# Altium PCB AnalyzerEMG.PcbDoc
Units mm, origin at the board's own origin, x right, y up, seen from the top; angles counter-clockwise.
Board outline 57.78 x 36.83 mm, 2 copper layers (Top Layer, Bottom Layer); 29 components, 22 nets, 79 pads, 11 vias.
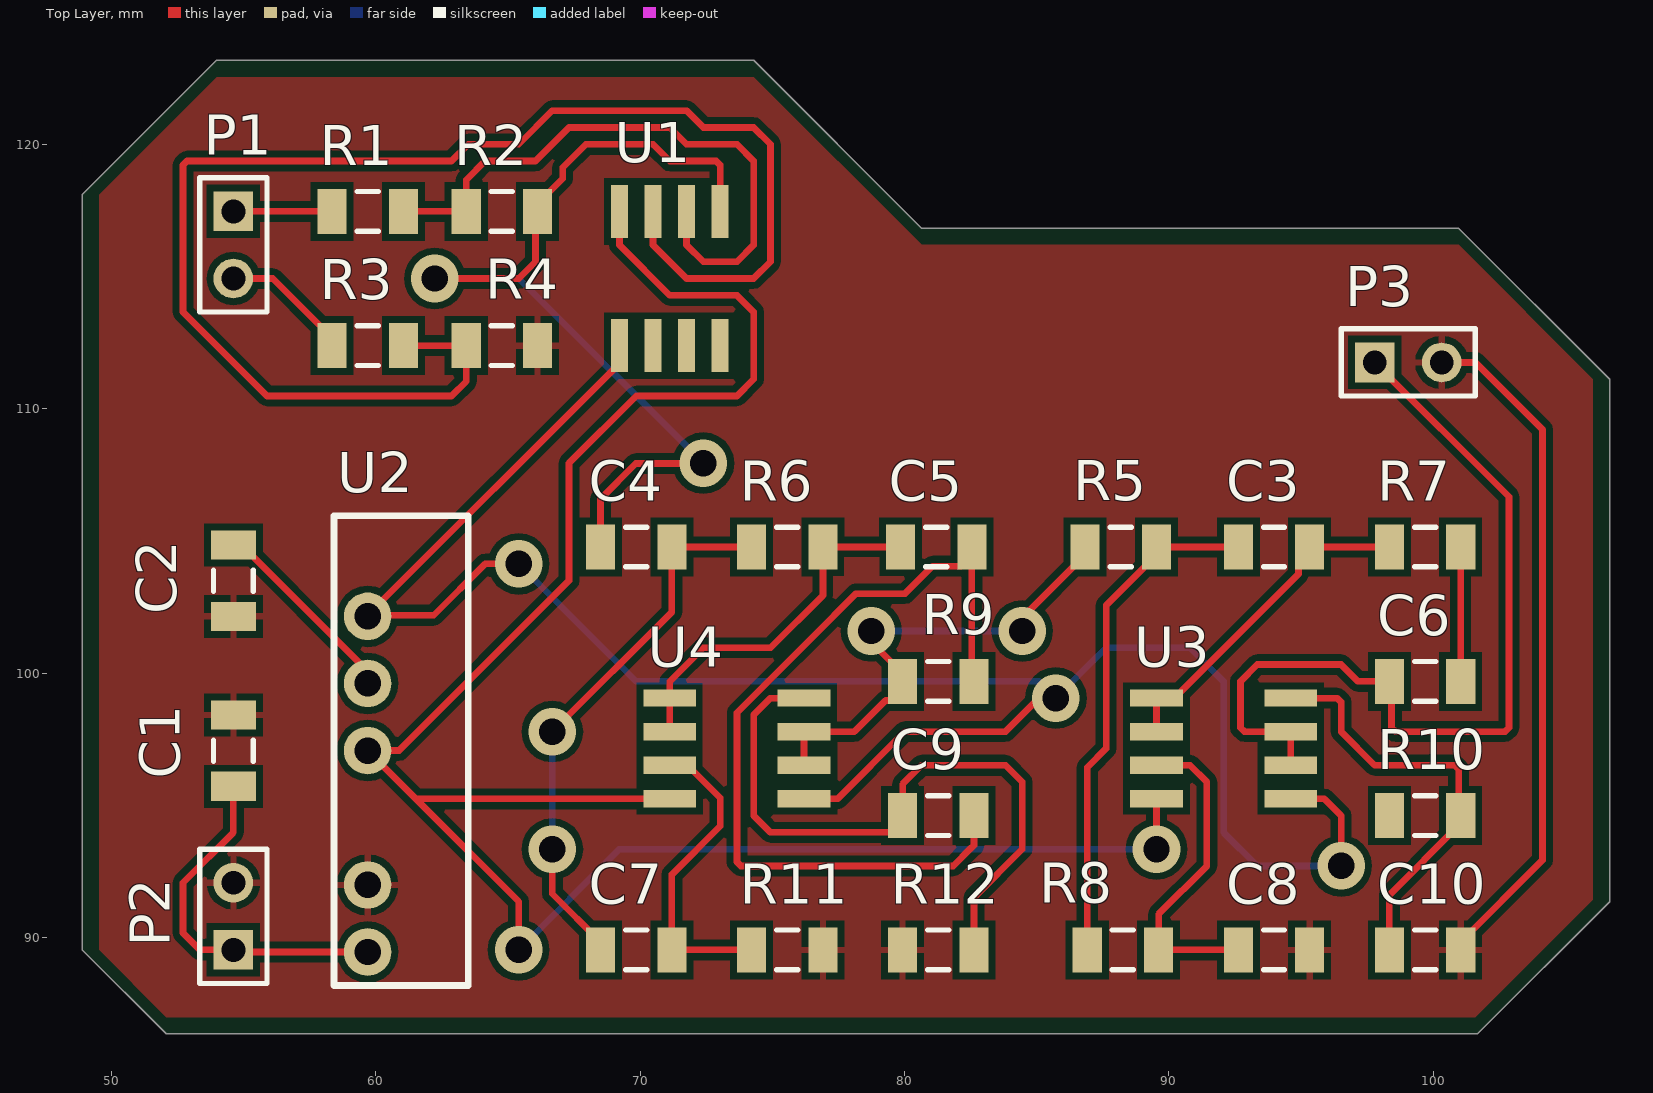
[diagram p0: Top Layer view]
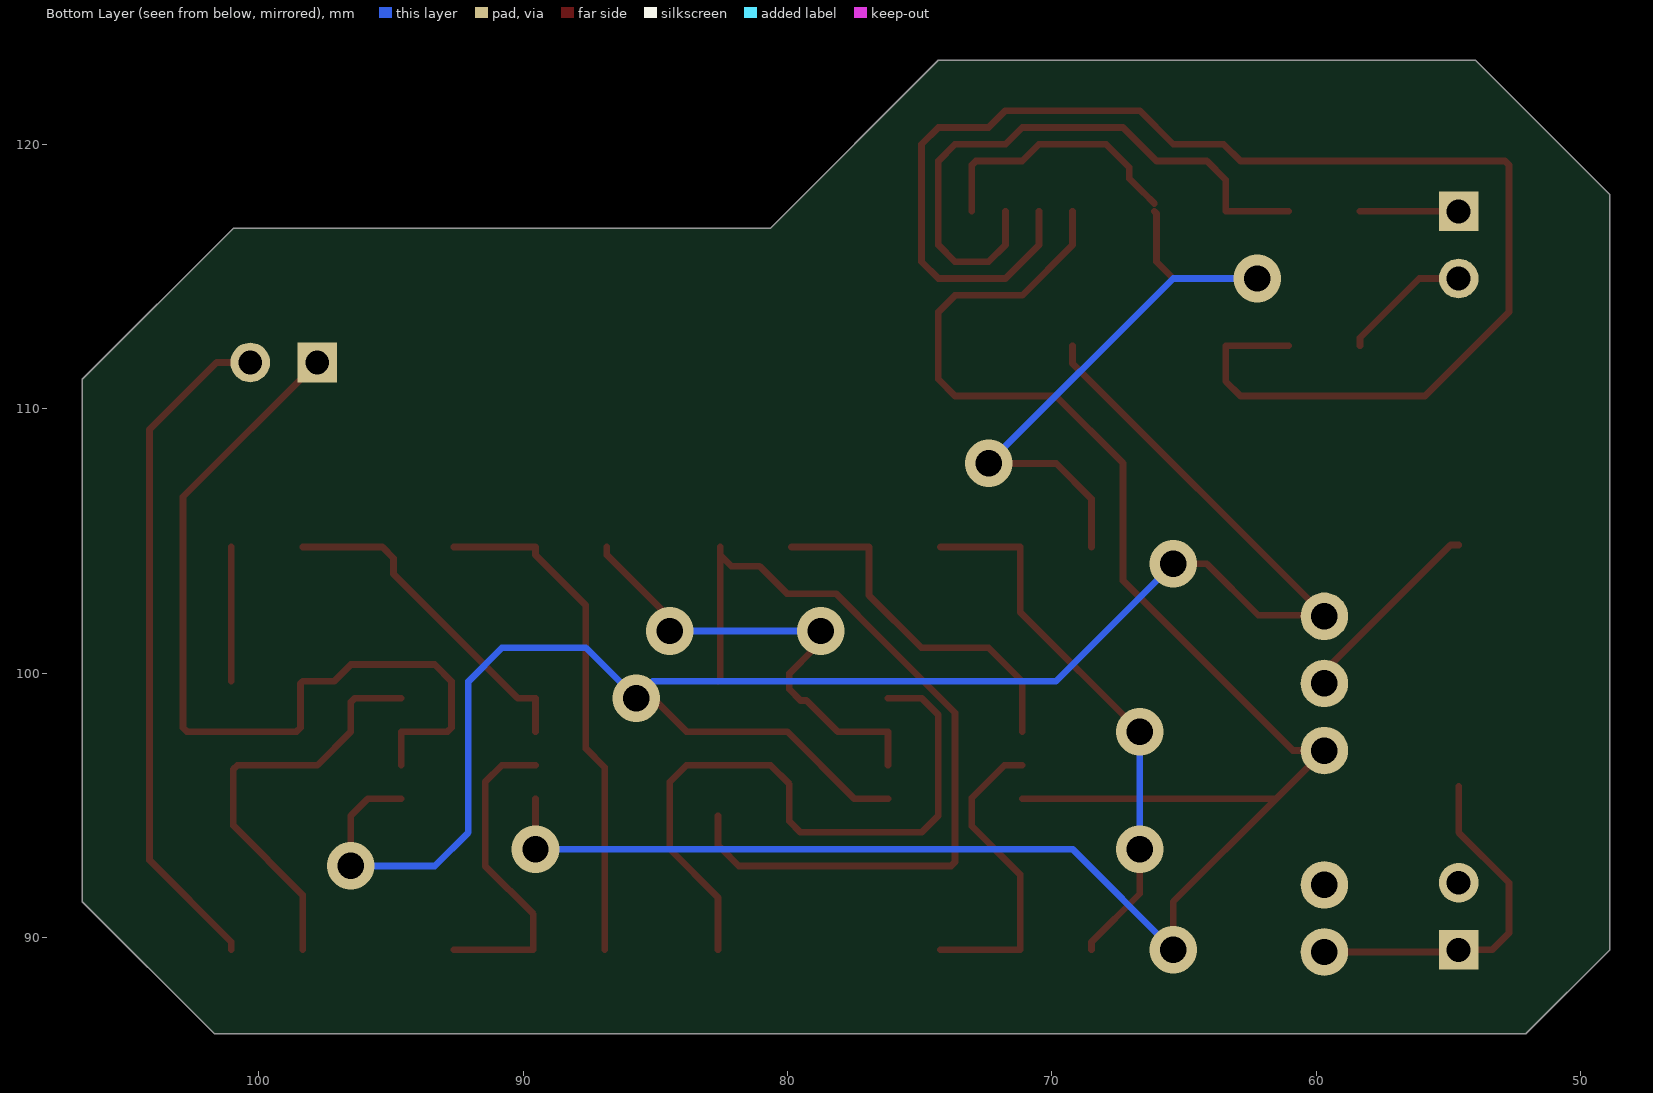
[diagram p1: Bottom Layer view, seen from below]

## Layer stack, top to bottom
Top Solder: solder mask 0.0102, Solder Resist, Dk 3.5
Top Layer: signal copper 0.0356
Dielectric 1: dielectric 0.32, FR-4, Dk 4.8
Bottom Layer: signal copper 0.0356
Bottom Solder: solder mask 0.0102, Solder Resist, Dk 3.5

## Board outline
52.07,86.36 48.895,89.535 48.895,118.11 53.975,123.19 74.295,123.19 80.645,116.84 100.965,116.84 106.68,111.125 106.68,91.36 101.68,86.36

## Design rules (kind name [scope] priority, off if disabled: settings)
Clearance [All] p1: gap=0.254 ignorepadtopadclearanceinfootprint=FALSE except(0: Arc-Hole Track-Hole SMDPad-Hole THPad-Hole Via-Hole Fill-Hole Poly-Hole Region-Hole Text-Hole)
PolygonConnect [All] p1: connectstyle=Relief reliefconductorwidth=0.254 reliefentries=4 polygonreliefangle="90 Angle" airgapwidth=0.254
RoomDefinition AnalyzerEMG [InComponentClass('AnalyzerEMG')] p1: confinementstyle=ConfineIn formatcopy=TRUE lockcomponents=FALSE outline 48.26,85.725 107.315,85.725 107.315,123.825 48.26,123.825
RoutingVias [All] p1: holewidth=0.711 width=1.27 viastyle="Through Hole" minholewidth=0.711 minwidth=1.27 maxholewidth=0.711 maxwidth=1.27
SolderMaskExpansion [All] p1: expansion=0.102 istentingtop=FALSE
Width [All] p1: maxlimit=0.254 minlimit=0.254 preferedwidth=0.254
30 further rules are at their usual default settings.

## Classes and differential pairs
component class AnalyzerEMG: C1 C2 C4 C7 C8 C9 C10 P1 P2 P3 R1 R2 R3 R4 R9 R10 R11 R12 U1 U4

## Components (designator, comment, footprint, x,y, rotation, side; value= is the part's Value field where it differs from the comment)
C1 "Cap Pol2" C1206 54.61,97.075 r90 top value=100pF
C2 "Cap Pol2" C1206 54.61,103.505 r270 top value=100pF
C3 "Cap" C1206 93.98,104.775 r180 top value=100pF
C4 "Cap" C1206 69.85,104.775 r0 top value=100pF
C5 "Cap" C1206 81.2,104.775 r0 top value=100pF
C6 "Cap" C1206 99.695,99.695 r180 top value=100pF
C7 "Cap" C1206 69.85,89.535 r180 top value=100pF
C8 "Cap" C1206 93.98,89.535 r180 top value=100pF
C9 "Cap" C1206 81.28,94.615 r0 top value=100pF
C10 "Cap" C1206 99.695,89.535 r180 top value=100pF
P1 "Header 2" HDR1X2 54.61,117.475 r270 top
P2 "Header 2" HDR1X2 54.61,89.535 r90 top
P3 "Header 2" HDR1X2 97.79,111.76 r0 top
R1 "Res2" C1206 59.69,117.475 r0 top value=1K
R2 "Res2" C1206 64.77,117.475 r0 top value=1K
R3 "Res2" C1206 59.69,112.395 r0 top value=1K
R4 "Res2" C1206 64.77,112.395 r180 top value=1K
R5 "Res2" C1206 88.185,104.775 r0 top value=1K
R6 "Res2" C1206 75.565,104.775 r180 top value=1K
R7 "Res2" C1206 99.695,104.775 r180 top value=1K
R8 "Res2" C1206 88.265,89.535 r180 top value=1K
R9 "Res2" C1206 81.28,99.695 r0 top value=1K
R10 "Res2" C1206 99.695,94.615 r180 top value=1K
R11 "Res2" C1206 75.565,89.535 r180 top value=1K
R12 "Res2" C1206 81.28,89.535 r0 top value=1K
U1 "TL072" TL072 69.215,117.475 r270 top
U2 "A0505S-1WR2" A0505S-1WR2 59.69,89.455 r0 top
U3 "TL072" TL072 89.535,95.25 r0 top
U4 "TL072" TL072 71.12,95.25 r0 top

## Footprints (in the part's own frame and the unit in brackets; to place one, negate y for a bottom-side part, rotate by r counter-clockwise, add the part's x,y. Pads: shape width x height; smd on the part's side, far side on the other; paste and mask are expansions set on the pad)
A0505S-1WR2 [mm]
  round 1.8 hole 1: 1(0,0) 2(0,2.54) 3(0,7.62) 4(0,10.16) 5(0,12.7)
  silkscreen extent -1.27,-1.27 3.81,16.51
C1206 [mm] "Chip Capacitor, Body 3.2x1.6mm, IPC High Density"
  rect 1.1x1.7 smd: 1(-1.35,0) 2(1.35,0)
  silkscreen extent -0.4,-0.75 0.4,0.75, body extent -1.7,-0.9 1.7,0.9, height 1.3
HDR1X2 [mm] "Connector; Header; 2 Position"
  rect 1.5x1.5 hole 0.9: 1(0,0)
  round 1.5 hole 0.9: 2(2.54,0)
  silkscreen extent -1.27,-1.27 3.81,1.27
TL072 [mm]
  rect 2x0.65 smd: 1(0,3.81) 2(0,2.54) 3(0,1.27) 4(0,0) 5(5.08,3.81) 6(5.08,2.54) 7(5.08,1.27) 8(5.08,0)

## Part data
C1 C2: "Polarized Capacitor (Axial)", LatestRevisionDate=17-Jul-2002, LatestRevisionNote="Re-released for DXP Platform.", PackageDescription="Polarized Capacitor; 2 Leads", PackageReference=POLAR0.8, Published=8-Jun-2000, Publisher="Altium Limited"
C3 C4 C5 C6 C7 C8 C9 C10: "Capacitor", LatestRevisionDate=17-Jul-2002, LatestRevisionNote="Re-released for DXP Platform.", PackageDescription="Radial Cap, Thru-Hole; 2 Leads; 0.3 in Pin Spacing", PackageReference=RAD-0.3, Published=8-Jun-2000, Publisher="Altium Limited"
P1 P2 P3: "Header, 2-Pin", LatestRevisionDate=17-Jul-2002, LatestRevisionNote="Re-released for DXP Platform.", Publisher="Altium Limited"
R1 R2 R3 R4 R5 R6 R7 R8 R9 R10 R11 R12: "Resistor", LatestRevisionDate=17-Jul-2002, LatestRevisionNote="Re-released for DXP Platform.", PackageDescription="Axial Device, Thru-Hole; 2 Leads; 0.4 in Pin Spacing", PackageReference=AXIAL-0.4, Published=8-Jun-2000, Publisher="Altium Limited"

## Via types
v1: diameter 1.8, hole 1, Top Layer to Bottom Layer, 11 vias

## Nets (pads, with @x,y where several pads share a name; then routed paths per layer and width w, separated by ;. In a path a pad name is that pad's centre, name@x,y a point inside that pad or via, vN(x,y) a via of type N, cw(c..) or ccw(c..) an arc to the next point about the centre after c; other vN are vias at no path point)
+5: U1.8 U2.5 U3.8 U4.8 | length 76.7
  Top Layer w0.254: v1(65.405,104.14) 64.135,104.14 62.19,102.195 59.73,102.195 59.69,102.155 59.69,102.195 69.215,111.72 U1.8 ; U4.8 77.47,95.25 80.01,97.79 83.82,97.79 85.09,99.06 v1(85.725,99.06) ; U3.8 95.885,95.25 96.52,94.615 v1(96.52,92.71)
  Bottom Layer w0.254: v1(65.405,104.14) 69.85,99.695 85.09,99.695 v1(85.725,99.06) 87.63,100.965 90.805,100.965 92.075,99.695 92.075,93.98 93.345,92.71 v1(96.52,92.71)
-5: U1.4 U2.3 U3.4 U4.4 | length 80.1
  Top Layer w0.254: v1(65.405,89.535) 65.405,91.36 61.515,95.25 ; U1.4 69.215,116.205 71.12,114.3 73.66,114.3 74.295,113.665 74.295,111.125 73.66,110.49 69.85,110.49 67.31,107.95 67.31,103.505 60.88,97.075 59.69,97.075 61.515,95.25 ; U4.4 61.515,95.25 ; v1(89.535,93.345) U3.4
  Bottom Layer w0.254: v1(65.405,89.535) 69.215,93.345 v1(89.535,93.345)
GND: C1.2 C2.2 C8.1 C10.1 P2.2 P3.2 R4.1 R11.1 R12.1 U2.2 | length 25.8
  Top Layer w0.254: P3.2 101.6,111.76 104.14,109.22 104.14,92.93 101.045,89.835 C10.1
NetC1_1: C1.1 P2.1 U2.1 | length 13.6
  Top Layer w0.254: C1.1 54.61,93.98 52.705,92.075 52.705,90.17 53.34,89.535 P2.1 54.69,89.455 U2.1@59.69,89.455
NetC2_1: C2.1 U2.4 | length 7.5
  Top Layer w0.254: C2.1 54.91,104.855 59.509,100.256 59.509,99.796 U2.4@59.69,99.615
NetC3_1: C3.1 R7.2 U3.1 U3.2 | length 12.8
  Top Layer w0.254: U3.2 U3.1 90.21,99.06 94.907,103.757 94.907,104.352 C3.1 R7.2
NetC3_2: C3.2 R5.2 R8.2 | length 19.4
  Top Layer w0.254: R8.2 86.915,96.44 87.63,97.155 87.63,102.57 89.535,104.475 R5.2 C3.2
NetC4_1: C4.1 R2.2 U1.1 | length 35.5
  Top Layer w0.254: v1(62.23,114.935) 65.405,114.935 66.04,115.57 66.04,117.395 R2.2 ; R2.2@66.12,117.775 66.543,118.198 66.551,118.198 67.07,118.717 67.07,119.14 67.945,120.015 70.485,120.015 71.12,119.38 72.876,119.38 73.025,119.231 U1.1 ; C4.1 68.5,106.6 69.833,107.933 72.373,107.933 v1(72.39,107.95)
  Bottom Layer w0.254: v1(62.23,114.935) 65.405,114.935 v1(72.39,107.95)
NetC4_2: C4.2 C7.2 R6.2 | length 20.9
  Top Layer w0.254: v1(66.675,93.345) 66.675,91.66 68.5,89.835 C7.2 ; v1(66.675,97.79) 71.2,102.315 C4.2 R6.2
  Bottom Layer w0.254: v1(66.675,93.345) v1(66.675,97.79)
NetC5_1: C5.1 R6.1 U4.1 U4.2 | length 13.8
  Top Layer w0.254: U4.2 U4.1 71.12,99.695 72.39,100.965 74.93,100.965 76.915,102.95 R6.1 C5.1
NetC5_2: C5.2 C9.2 R9.2 | length 32.6
  Top Layer w0.254: C5.2 C5.2@82.55,104.475 ; C9.2 82.63,93.494 82.481,93.345 81.846,92.71 73.809,92.71 73.66,92.859 73.66,98.508 76.495,101.344 78.163,103.011 80.025,103.011 81.066,104.052 82.127,104.052 C5.2@82.55,104.475 ; R9.2 82.55,99.775 C5.2@82.55,104.475
NetC6_1: C6.1 R7.1 | length 5.1
  Top Layer w0.254: C6.1 R7.1
NetC6_2: C6.2 P3.1 U3.6 U3.7 | length 33.4
  Top Layer w0.254: U3.7 U3.6 92.859,97.79 92.71,97.939 92.71,99.695 93.345,100.33 96.52,100.33 97.155,99.695 C6.2 98.425,99.615 98.425,97.939 98.574,97.79 102.721,97.79 102.87,97.939 102.87,106.68 P3.1
NetC7_1: C7.1 R11.2 U4.3 | length 11.9
  Top Layer w0.254: U4.3 71.795,96.52 73.025,95.29 73.025,94.21 71.2,92.386 C7.1 R11.2
NetC8_2: C8.2 R8.1 U3.3 | length 12.3
  Top Layer w0.254: U3.3 90.805,96.52 91.44,95.885 91.44,92.71 89.615,90.885 R8.1 C8.2
NetC9_1: C9.1 R12.2 U4.5 | length 25.6
  Top Layer w0.254: U4.5 74.93,99.06 74.295,98.425 74.295,94.615 74.93,93.98 79.507,93.98 79.93,94.403 C9.1 79.93,95.805 80.645,96.52 83.82,96.52 84.455,95.885 84.455,93.345 82.63,91.52 R12.2
NetC10_2: C10.2 R10.1 U3.5 | length 16
  Top Layer w0.254: U3.5 96.371,99.06 96.52,98.911 96.52,97.79 97.79,96.52 100.816,96.52 100.965,96.371 100.965,94.235 98.345,91.615 C10.2
NetP1_1: P1.1 R1.1 | length 3.7
  Top Layer w0.254: P1.1 R1.1
NetP1_2: P1.2 R3.1 | length 5
  Top Layer w0.254: P1.2 56.1,114.935 58.34,112.695 R3.1
NetR1_2: R1.2 R2.1 U1.2 | length 23.3
  Top Layer w0.254: R1.2 R2.1 63.42,118.665 64.135,119.38 66.04,119.38 67.31,120.65 71.12,120.65 71.755,120.015 73.66,120.015 74.295,119.38 74.295,116.205 73.66,115.57 72.39,115.57 71.755,116.205 U1.2
NetR3_2: R3.2 R4.2 U1.3 | length 56.1
  Top Layer w0.254: R3.2 R4.2 63.42,111.045 62.865,110.49 55.88,110.49 52.705,113.665 52.705,119.231 52.854,119.38 62.865,119.38 63.5,120.015 65.405,120.015 66.675,121.285 71.755,121.285 72.39,120.65 74.295,120.65 74.93,120.015 74.93,115.57 74.295,114.935 71.755,114.935 70.485,116.205 U1.3
NetR5_1: R5.1 R9.1 U4.6 U4.7 | length 17.5
  Top Layer w0.254: U4.7 U4.6 78.105,97.79 79.287,98.972 79.507,98.972 79.93,99.395 R9.1 79.93,99.995 v1@78.998,100.927 ; v1(84.455,101.6) 84.713,101.858 84.713,102.353 86.835,104.475 R5.1
  Bottom Layer w0.254: v1(78.74,101.6) v1(84.455,101.6)
pads on no net: R10.2 U1.5 U1.6 U1.7

## Polygon pours and split planes (outlines as drawn)
GND on Top Layer "GND_L01_P002" (solid, pour order 2): 53.975,122.555 49.53,118.11 49.53,89.535 52.07,86.995 101.6,86.995 106.045,91.44 106.045,111.125 100.965,116.205 80.645,116.205 74.295,122.555
no net on Top Layer "NONET_L01_P000" (solid, pour order 0): 50.165,121.92

## Silkscreen, mask and mechanical layers (free items; w line width, h text height)
Mechanical 1:
  the board outline again, w0.254